# EAGLE board demo2_Inch (EAGLE 9.6.2)
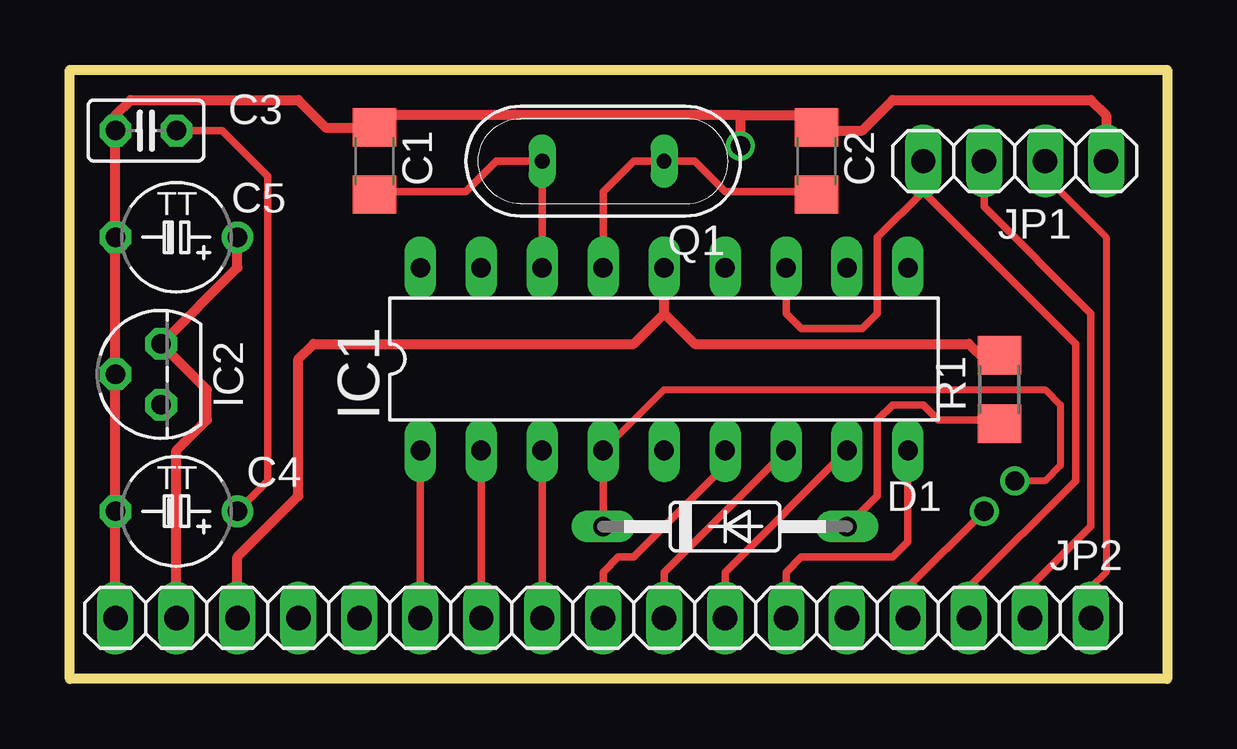
[diagram p0: board, top side]
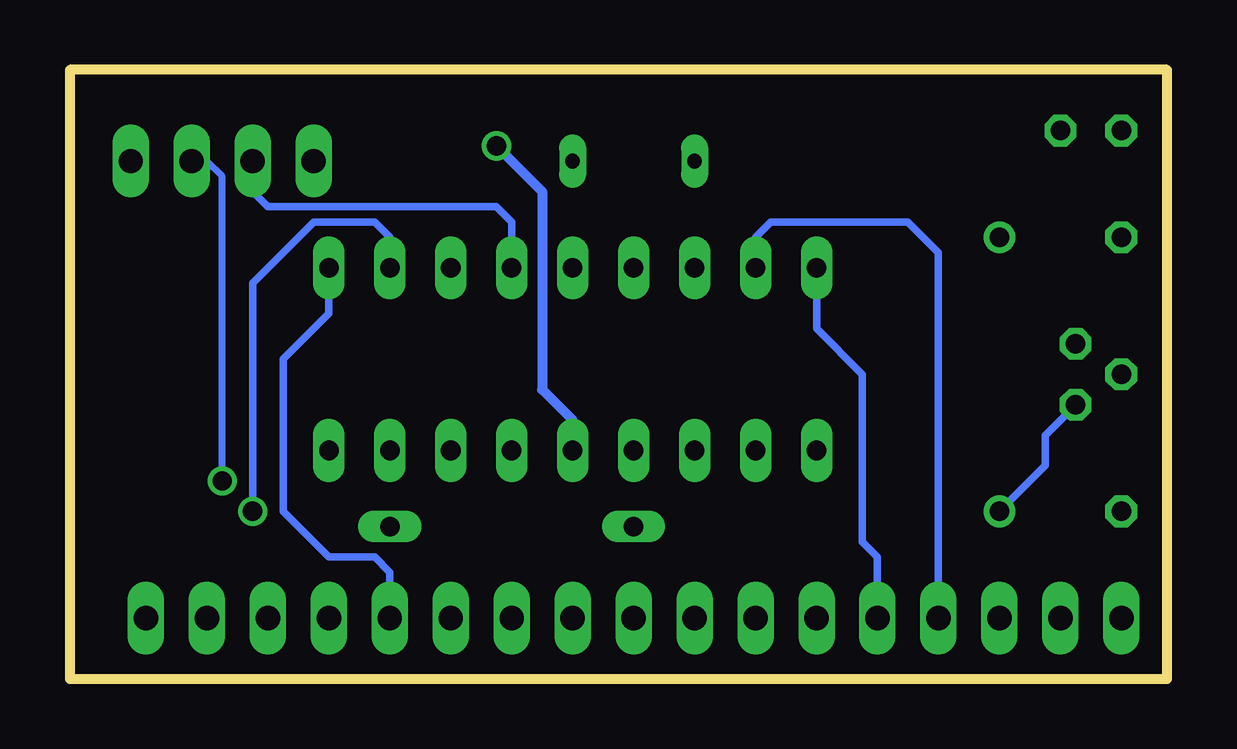
[diagram p1: board, bottom side, seen from below]

Size 45.72 x 25.4 mm. Coordinates in mm from the lower left corner, seen from the top.
Outline: 0,0 0,25.4 45.72,25.4 45.72,0 0,0
Copper layers (1*16): Top 0.035mm / dielectric 1.5mm / Bottom 0.035mm
Design rules "default": minimum track width 10mil, minimum drill 24mil, track to track 8mil, track to pad 8mil, pad to pad 8mil, via to via 8mil, smd to smd 8mil, copper to edge 40mil, drill to drill 8mil, minimum pad ring 10mil, minimum via ring 8mil, stop-mask expansion 4mil, vias tented up to drill 0mil, thermal gap 10mil
Net classes: 0 default: width 0.3 mm, drill 0.6 mm, clearance 0.2 mm; 1 power: width 0.4 mm, drill 0.6 mm, clearance 0.2 mm

## Footprints (pad centres in the part's own frame; a part is rotated, then mirrored left to right if it is on the bottom)
C1206 = smd 1.6 x 1.8: 1 -1.4,0; 2 1.4,0
C025-025X050 = drill 0.813 octagon: 1 -1.27,0; 2 1.27,0
TAP5-45 = drill 0.813: + -2.54,0 | drill 0.813 octagon: - 2.54,0
DO35-10 = drill 0.813 long: A 5.08,0; C -5.08,0
DIL18 = drill 0.813 long: 1 -10.16,-3.81; 2 -7.62,-3.81; 3 -5.08,-3.81; 4 -2.54,-3.81; 5 0,-3.81; 6 2.54,-3.81; 7 5.08,-3.81; 8 7.62,-3.81; 9 10.16,-3.81; 10 10.16,3.81; 11 7.62,3.81; 12 5.08,3.81; 13 2.54,3.81; 14 0,3.81; 15 -2.54,3.81; 16 -5.08,3.81; 17 -7.62,3.81; 18 -10.16,3.81
TO92 = drill 0.813 octagon: 1 -1.27,0; 2 0,1.905; 3 1.27,0
1X04 = drill 1.016 long: 1 -3.81,0; 2 -1.27,0; 3 1.27,0; 4 3.81,0
1X17 = drill 1.016 long: 1 -20.32,0; 2 -17.78,0; 3 -15.24,0; 4 -12.7,0; 5 -10.16,0; 6 -7.62,0; 7 -5.08,0; 8 -2.54,0; 9 0,0; 10 2.54,0; 11 5.08,0; 12 7.62,0; 13 10.16,0; 14 12.7,0; 15 15.24,0; 16 17.78,0; 17 20.32,0
QS = drill 0.61 long: 1 -2.54,0; 2 2.54,0
R1206 = smd 1.6 x 1.803: 1 -1.422,0; 2 1.422,0

## Placement (x,y rotation side)
C1  30p  [C1206]  12.7,21.59 270 top
C2  30p  [C1206]  31.11,21.59 270 top
C3  10n  [C025-025X050]  3.17,22.86 180 top
C4  47u/25V  [TAP5-45]  4.45,6.99 180 top
C5  47u  [TAP5-45]  4.45,18.41 180 top
D1  1N4148  [DO35-10]  27.3,6.35 0 top
IC1  PIC16F84AP  [DIL18]  24.77,13.34 0 top
IC2  78L05Z  [TO92]  3.81,12.7 90 top
JP1  PROG  [1X04]  39.37,21.59 0 top
JP2  APPL  [1X17]  22.23,2.54 180 top
Q1  [QS]  22.23,21.59 180 top
R1  2,2k  [R1206]  38.73,12.06 270 top

## Library data of the parts
C1-C5 R1 = rcl
D1 = diode
IC1 = microchip
IC2 = linear
JP1 JP2 = PINHEAD
Q1 = special

## Nets
+5V [power]: IC1.14 JP2.15 R1.1
GND [power]: C1.1 C2.1 C3.2 C4.- C5.- IC1.5 IC2.2 JP1.4 JP2.17
MCLR/PGM: D1.C IC1.4 JP1.3 JP2.1
N$1: C3.1 C4.+ IC2.1
N$2: C1.2 IC1.16 Q1.2
N$3: C2.2 IC1.15 Q1.1
N$4: D1.A R1.2
RA0: IC1.17 JP2.14
RA1: IC1.18 JP2.13
RA2: IC1.1 JP2.12
RA3: IC1.2 JP2.11
RA4: IC1.3 JP2.10
RB0: IC1.6 JP2.9
RB1: IC1.7 JP2.8
RB2: IC1.8 JP2.7
RB3: IC1.9 JP2.6
RB4: IC1.10 JP2.5
RB5: IC1.11 JP2.4
RB6/CLK: IC1.12 JP1.1 JP2.3
RB7/DATA: IC1.13 JP1.2 JP2.2
V+ [power]: C5.+ IC2.3 JP2.16

## Tracks (layer width: path | path; a pad name or v marks a point on that pad's centre or on a via)
+5V
  Top 0.406: 24.77,15.24 23.5,13.97 10.16,13.97 9.53,13.34 9.53,7.62 6.99,5.08 JP2.15 | 24.77,15.24 IC1.14 | 24.77,15.24 26.04,13.97 37.47,13.97 38.1,13.34 38.73,13.34 R1.1
GND  (via drill 0.81)
  Top 0.406: JP2.17 C4.- IC2.2 C5.- C3.2 1.91,23.5 2.54,24.13 9.53,24.13 10.66,22.99 12.57,22.99 12.7,22.86 | 27.94,23.5 13.34,23.5 12.7,22.86 | JP1.4 43.18,23.5 42.55,24.13 34.29,24.13 33.02,22.86 31.11,22.86 | 27.94,23.5 30.48,23.5 31.11,22.86 | 27.94,23.5 v27.94,22.23 | 31.11,22.86 C2.1 | 12.7,22.86 C1.1
  Bottom 0.406: v27.94,22.23 26.04,20.32 26.04,12.06 24.77,10.79 IC1.5
MCLR/PGM  (via drill 0.8)
  Top 0.3: JP2.1 42.55,3.81 43.18,4.45 43.18,18.41 40.64,20.95 JP1.3 | v39.37,8.26 40.64,8.26 41.27,8.89 41.27,11.43 40.64,12.06 24.77,12.06 IC1.4
  Top 0.305: D1.C IC1.4
  Bottom 0.3: v39.37,8.26 39.37,20.95 40.01,21.59 JP1.3
N$1
  Top 0.305: C3.1 6.35,22.86 8.26,20.95 8.26,8.26 C4.+
  Bottom 0.305: C4.+ 5.08,8.89 5.08,10.16 IC2.1
N$2
  Top 0.305: C1.2 12.83,20.32 16.51,20.32 17.78,21.59 Q1.2 IC1.16
N$3
  Top 0.305: IC1.15 22.23,20.32 23.5,21.59 Q1.1 26.04,21.59 27.3,20.32 31.11,20.32 C2.2
N$4
  Top 0.305: D1.A 33.66,7.62 33.66,10.79 34.29,11.43 35.56,11.43 36.2,10.79 38.73,10.79 R1.2
RA0
  Bottom 0.305: IC1.17 17.14,18.41 16.51,19.05 10.79,19.05 9.53,17.78 JP2.14
RA1
  Bottom 0.305: IC1.18 14.61,14.61 12.7,12.7 12.7,5.71 12.06,5.08 JP2.13
RA2
  Top 0.305: JP2.12 IC1.1
RA3
  Top 0.305: JP2.11 IC1.2
RA4
  Top 0.305: JP2.10 IC1.3
RB0
  Top 0.305: JP2.9 22.23,4.45 22.86,5.08 23.5,5.08 27.3,8.89 IC1.6
RB1
  Top 0.305: JP2.8 24.77,4.45 IC1.7
RB2
  Top 0.305: JP2.7 27.3,4.45 IC1.8
RB3
  Top 0.305: JP2.6 29.84,4.45 30.48,5.08 34.29,5.08 34.92,5.71 IC1.9
RB4
  Bottom 0.305: IC1.10 34.92,15.24 36.83,13.34 36.83,6.99 34.92,5.08 33.02,5.08 32.38,4.45 JP2.5
RB5  (via drill 0.81)
  Top 0.305: JP2.4 34.92,3.81 v38.1,6.99
  Bottom 0.305: v38.1,6.99 38.1,16.51 35.56,19.05 33.02,19.05 32.38,18.41 IC1.11
RB6/CLK
  Top 0.305: 35.56,20.32 41.91,13.97 41.91,8.26 37.47,3.81 JP2.3 | 35.56,20.32 JP1.1 | 35.56,20.32 33.66,18.41 33.66,15.24 33.02,14.61 30.48,14.61 29.84,15.24 IC1.12
RB7/DATA
  Top 0.305: JP1.2 38.1,19.68 42.55,15.24 42.55,6.35 40.01,3.81 JP2.2
  Bottom 0.305: IC1.13 27.3,19.05 27.94,19.68 37.47,19.68 38.1,20.32 JP1.2
S$1
  Top 0.406: 0,0 0,25.4
S$2
  Top 0.406: 45.72,0 0,0
S$3
  Top 0.406: 45.72,25.4 45.72,0
S$4
  Top 0.406: 0,25.4 45.72,25.4
S$5
  Bottom 0.406: 0,0 0,25.4
S$6
  Bottom 0.406: 45.72,0 0,0
S$7
  Bottom 0.406: 45.72,25.4 45.72,0
S$8
  Bottom 0.406: 0,25.4 45.72,25.4
V+
  Top 0.406: C5.+ 6.99,17.14 IC2.3 5.71,12.06 5.71,10.79 4.45,9.53 JP2.16